# Altium PCB BAILEY.PcbDoc (part 3 of 8)
Units mil, origin at the board's own origin, x right, y up, seen from the top; angles counter-clockwise.
Board outline 4500 x 4000 mil, 4 copper layers (Signal Layer 1, Signal Layer 2, Signal Layer 3, Signal Layer 4), stack 59.904 mil thick; 190 components, 117 nets, 664 pads, 291 vias.
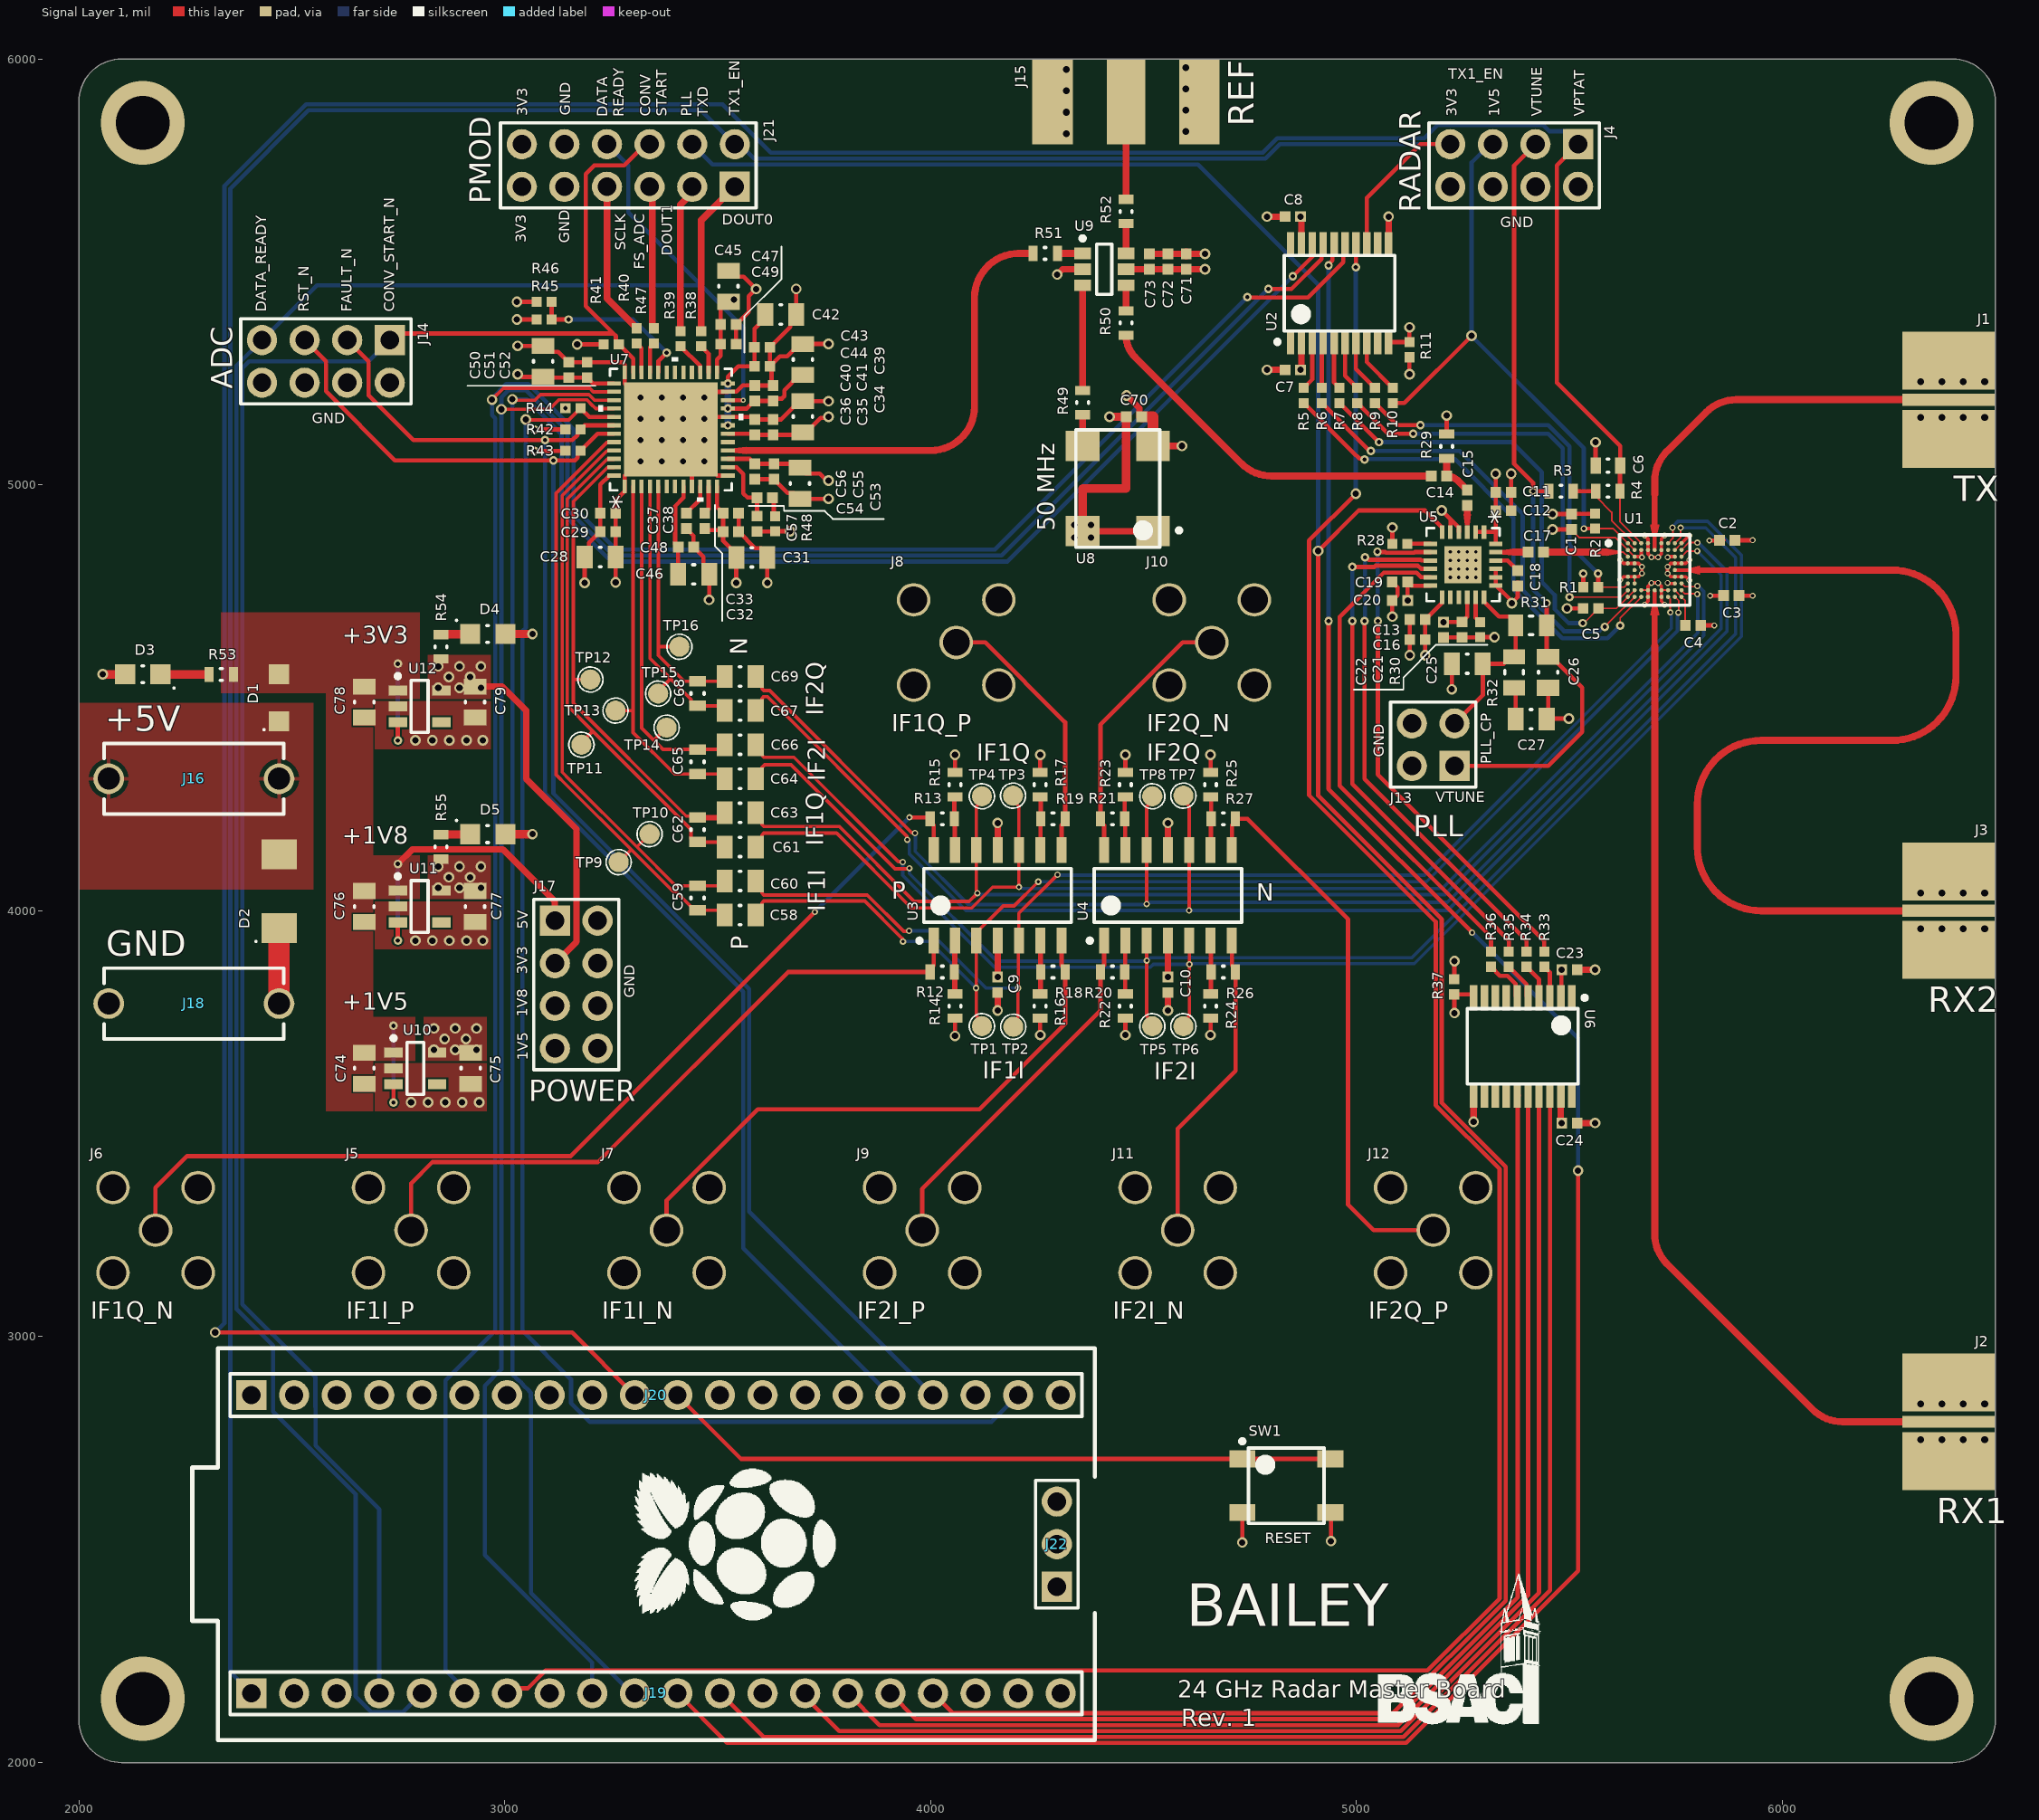
[diagram p0: Signal Layer 1 view]

## Part data (continued)
C74 C75 C76 C77 C78 C79: library part CAP, "50V 1uF X7R ±10% 0805 Multilayer Ceramic Capacitors MLCC - SMD/SMT ROHS", Case Code (Imperial)=0805, Case Code (Metric)=2012, Dielectric=Ceramic, Manufacturer="Samsung Electro-Mechanics", Manufacturer Part Number=CL21B105KBFNNNE, Max Operating Temperature=125°C, Min Operating Temperature=-55°C, Supplier Part Number=1276-1029-1-ND, Tolerance=10%, Voltage=50V, Voltage Rating="50 V", Case/Package=0805, Category="Ceramic Capacitors", China RoHS=Compliant, ComponentLink1Description=https://datasheet.octopart.com:443/CL21B105KBFNNNE-Samsung-Electro-Mechanics-datasheet-136482495.pdf?src-supplier=IHS, ComponentLink1URL=https://datasheet.octopart.com:443/CL21B105KBFNNNE-Samsung-Electro-Mechanics-datasheet-136482495.pdf?src-supplier=IHS, ComponentLink2Description=https://datasheet.octopart.com:443/CL21B105KBFNNNE-Samsung-Electro-Mechanics-datasheet-11733377.pdf?src-supplier=Future+Electronics, ComponentLink2URL=https://datasheet.octopart.com:443/CL21B105KBFNNNE-Samsung-Electro-Mechanics-datasheet-11733377.pdf?src-supplier=Future+Electronics, ComponentLink3Description=https://datasheet.octopart.com:443/CL21B105KBFNNNE-Samsung-Electro-Mechanics-datasheet-116891038.pdf?src-supplier=Future+Electronics, ComponentLink3URL=https://datasheet.octopart.com:443/CL21B105KBFNNNE-Samsung-Electro-Mechanics-datasheet-116891038.pdf?src-supplier=Future+Electronics, ComponentLink4Description=https://datasheet.octopart.com:443/CL21B105KBFNNNE-Samsung-Electro-Mechanics-datasheet-81462183.pdf?src-supplier=Future+Electronics, ComponentLink4URL=https://datasheet.octopart.com:443/CL21B105KBFNNNE-Samsung-Electro-Mechanics-datasheet-81462183.pdf?src-supplier=Future+Electronics, ComponentLink5Description=https://datasheet.octopart.com:443/CL21B105KBFNNNE-Samsung-datasheet-48647582.pdf?src-supplier=Future+Electronics, ComponentLink5URL=https://datasheet.octopart.com:443/CL21B105KBFNNNE-Samsung-datasheet-48647582.pdf?src-supplier=Future+Electronics, ComponentLink6Description=https://datasheet.octopart.com:443/CL21B105KBFNNNE-Samsung-datasheet-8326294.pdf?src-supplier=Future+Electronics, ComponentLink6URL=https://datasheet.octopart.com:443/CL21B105KBFNNNE-Samsung-datasheet-8326294.pdf?src-supplier=Future+Electronics, ComponentLink7Description=https://datasheet.octopart.com:443/CL21B105KBFNNNE-Samsung-Electro-Mechanics-datasheet-149045959.pdf?src-supplier=Future+Electronics, ComponentLink7URL=https://datasheet.octopart.com:443/CL21B105KBFNNNE-Samsung-Electro-Mechanics-datasheet-149045959.pdf?src-supplier=Future+Electronics, ComponentLink8Description=https://datasheet.octopart.com/CL21B105KBFNNNE-Samsung-Electro-Mechanics-datasheet-97040617.pdf, ComponentLink8URL=https://datasheet.octopart.com/CL21B105KBFNNNE-Samsung-Electro-Mechanics-datasheet-97040617.pdf, ComponentLink9Description=https://datasheet.octopart.com/CL21B105KBFNNNE-Samsung-Electro-Mechanics-datasheet-8324245.pdf, ComponentLink9URL=https://datasheet.octopart.com/CL21B105KBFNNNE-Samsung-Electro-Mechanics-datasheet-8324245.pdf, ComponentLink10Description=https://datasheet.octopart.com:443/CL21B105KBFNNNE-Samsung-datasheet-59220082.pdf?src-supplier=TME, ComponentLink10URL=https://datasheet.octopart.com:443/CL21B105KBFNNNE-Samsung-datasheet-59220082.pdf?src-supplier=TME, Country of Origin="Mainland China, Philippines, South Korea", Depth=1.25mm, Dielectric Material=Ceramic, Export Control Classification Number (ECCN) Code=EAR99, Harmonized Tariff Schedule (HTS) Code=8532.24.00.20, Height=1.35mm, Introduction Date=2010-07-30, Length=2mm, Lifecycle Status=Production, Material=Ceramic, Mounting Technology="Surface Mount", Number of Terminals=2, Package Size=0805, Pricing="1=0.08, 10=0.013 (USD)", Radiation Hardening=No, REACH SVHC=Yes, RoHS=Compliant, Schedule B="8532240020, 8532240020|8532240020, 8532240020|8532240020|8532240020, 8532240020|8532240020|8532240020|8532240020", Stock=1783591, Supplier=DigiKey, Thickness=1.3462mm, Voltage Rating (DC)=50V, Width=1.25mm
D1: "Rectifier Diode, Schottky, 1 Phase, 1 Element, 1.5A, 30V V(RRM)", Average Rectified Current=1.5A, Current="1.5 A", Forward Voltage="360 mV @ 1.5 A", Manufacturer="Toshiba Semiconductor and Storage", Manufacturer Part Number=CRS08(TE85L,Q,M), Max Forward Surge Current (Ifsm)=30A, Max Junction Temperature (Tj)=125°C, Max Repetitive Reverse Voltage (Vrrm)=30V, Max Reverse Leakage Current=1mA, Min Operating Temperature=-40°C, Peak Reverse Current=50µA, Reverse Leakage Current="1 mA @ 30 V", Reverse Voltage="30 V", Supplier Part Number=CRS08QMCT-ND, Category="Rectifier Diodes", ComponentLink1Description=https://datasheet.octopart.com:443/CRS08%28TE85L%2CQ%2CM%29-Toshiba-datasheet-181389526.pdf?src-supplier=IHS, ComponentLink1URL=https://datasheet.octopart.com:443/CRS08%28TE85L%2CQ%2CM%29-Toshiba-datasheet-181389526.pdf?src-supplier=IHS, ComponentLink2Description=https://datasheet.octopart.com:443/CRS08%28TE85L%2CQ%2CM%29-Toshiba-datasheet-11891833.pdf?src-supplier=_legacy+Avnet, ComponentLink2URL=https://datasheet.octopart.com:443/CRS08%28TE85L%2CQ%2CM%29-Toshiba-datasheet-11891833.pdf?src-supplier=_legacy+Avnet, ComponentLink3Description=https://datasheet.octopart.com:443/CRS08%28TE85L%2CQ%2CM%29-Toshiba-datasheet-97785529.pdf?src-supplier=TME, ComponentLink3URL=https://datasheet.octopart.com:443/CRS08%28TE85L%2CQ%2CM%29-Toshiba-datasheet-97785529.pdf?src-supplier=TME, ComponentLink4Description=https://datasheet.octopart.com:443/CRS08%28TE85L%2CQ%2CM%29-Toshiba-datasheet-15948935.pdf?src-supplier=iiiC, ComponentLink4URL=https://datasheet.octopart.com:443/CRS08%28TE85L%2CQ%2CM%29-Toshiba-datasheet-15948935.pdf?src-supplier=iiiC, Contact Plating="Silver, Tin", Element Configuration=Single, Export Control Classification Number (ECCN) Code=EAR99, Forward Current=1.5A, Harmonized Tariff Schedule (HTS) Code=8541.10.00.80, Height=1.08mm, Introduction Date=2000-03-07, Lead Free="Lead Free", Lifecycle Status=Production, Max Operating Temperature=125°C, Max Output current=1.5A, Max Reverse Voltage (DC)=30V, Max Surge Current=30A, Mounting Technology="Surface Mount", Number of Elements=1, Packaging="Cut Tape (CT)", Peak Non-Repetitive Surge Current=30A, Pins=2, Pricing="1=0.61, 10=0.374, 100=0.2556, 500=0.19356, 1000=0.17356 (USD)", Radiation Hardening=No, REACH SVHC=No, Reverse Standoff Voltage=30V, RoHS=Compliant, Schedule B="8541100080, 8541100080|8541100080|8541100080|8541100080|8541100080", Stock=58545, Supplier=DigiKey
D2: "SMAJ Series 10.3 V 0.4 kW Surface Mount Uni-Directional TVS Diode - DO-214AC", Breakdown Voltage="6.67 V", Clamping Voltage=10.3V, Current=41A, Forward Voltage=3.5V, Leakage Current=1µA, Manufacturer="Littelfuse Inc.", Max Breakdown Voltage=7.37V, Max Junction Temperature (Tj)=150°C, Max Power Dissipation=3.3W, Max Reverse Leakage Current=800µA, Max Surge Current=38.8A, Maximum Clamping Voltage="10.3 V", Min Breakdown Voltage=6.67V, Min Operating Temperature=-65°C, Operating Supply Voltage=6V, Peak Pulse Power=400W, Power Line Protection=No, Reverse Breakdown Voltage=66.7V, Reverse Standoff Voltage="6 V", Supplier Part Number=SMAJ6.0ALFCT-ND, Test Current=10mA, Voltage=60V, Category="TVS Diodes", China RoHS=Non-Compliant, ComponentLink1Description=https://datasheet.octopart.com:443/SMAJ6.0A-Littelfuse-datasheet-150463581.pdf?src-supplier=Newark, ComponentLink1URL=https://datasheet.octopart.com:443/SMAJ6.0A-Littelfuse-datasheet-150463581.pdf?src-supplier=Newark, ComponentLink2Description=https://datasheet.octopart.com:443/SMAJ6.0A-Littelfuse-datasheet-63710798.pdf?src-supplier=element14+APAC, ComponentLink2URL=https://datasheet.octopart.com:443/SMAJ6.0A-Littelfuse-datasheet-63710798.pdf?src-supplier=element14+APAC, ComponentLink3Description=https://datasheet.octopart.com:443/SMAJ6.0A-Littelfuse-datasheet-11547152.pdf?src-supplier=Farnell, ComponentLink3URL=https://datasheet.octopart.com:443/SMAJ6.0A-Littelfuse-datasheet-11547152.pdf?src-supplier=Farnell, ComponentLink4Description=https://datasheet.octopart.com:443/SMAJ6.0A-Littelfuse-datasheet-5393952.pdf?src-supplier=Farnell, ComponentLink4URL=https://datasheet.octopart.com:443/SMAJ6.0A-Littelfuse-datasheet-5393952.pdf?src-supplier=Farnell, ComponentLink5Description=https://datasheet.octopart.com:443/SMAJ6.0A-Littelfuse-datasheet-511791.pdf?src-supplier=Farnell, ComponentLink5URL=https://datasheet.octopart.com:443/SMAJ6.0A-Littelfuse-datasheet-511791.pdf?src-supplier=Farnell, ComponentLink6Description=https://datasheet.octopart.com:443/SMAJ6.0A-Littelfuse-datasheet-165289143.pdf?src-supplier=Electro+Sonic, ComponentLink6URL=https://datasheet.octopart.com:443/SMAJ6.0A-Littelfuse-datasheet-165289143.pdf?src-supplier=Electro+Sonic, ComponentLink7Description=https://datasheet.octopart.com:443/SMAJ6.0A-Littelfuse-datasheet-112042111.pdf?src-supplier=JRH+Electronics, ComponentLink7URL=https://datasheet.octopart.com:443/SMAJ6.0A-Littelfuse-datasheet-112042111.pdf?src-supplier=JRH+Electronics, ComponentLink8Description=https://datasheet.octopart.com:443/SMAJ6.0A-Littelfuse-datasheet-17901671.pdf?src-supplier=Future+Electronics, ComponentLink8URL=https://datasheet.octopart.com:443/SMAJ6.0A-Littelfuse-datasheet-17901671.pdf?src-supplier=Future+Electronics, ComponentLink9Description=https://datasheet.octopart.com:443/SMAJ6.0A-Littelfuse-datasheet-1053.pdf?src-supplier=DigiKey, ComponentLink9URL=https://datasheet.octopart.com:443/SMAJ6.0A-Littelfuse-datasheet-1053.pdf?src-supplier=DigiKey, Composition=Zener, Country of Origin="Mainland China, Malaysia", Direction=Unidirectional, Export Control Classification Number (ECCN) Code=EAR99, Harmonized Tariff Schedule (HTS) Code=8541.10.00.50, Height=2.29mm, Introduction Date=2003-11-20, Lead Free="Lead Free", Length=5.28mm, Lifecycle Status=Production, Manufacturer Part Number=SMAJ6.0A, Max Operating Temperature=150°C, Mounting Technology="Surface Mount", Number of Channels=1, Number of Elements=1, Number of Terminals=2, Number of Unidirectional Channels=1, Packaging="Cut Tape", Peak Pulse Current=38.8A, Peak Reverse Current=800µA, Pins=2, Polarity=Unidirectional, Power Dissipation=400W, Power Rating=400W, Pricing="1=0.16, 10=0.129, 100=0.098, 500=0.097, 1000=0.096, 2000=0.0955, 5000=0.075, 10000=0.06958, 15000=0.05923, 25000=0.05912 (USD)", Radiation Hardening=No, REACH SVHC=No, Reverse Voltage=6V, RoHS=Compliant, Schedule B="8541100080, 8541100080|8541100080|8541100080|8541100080|8541100080", Stock=52074, Supplier=DigiKey, Termination=SMD/SMT, Voltage Rating (DC)=6V, Width=2.79mm
D3 D4 D5: "Chip Type LED, 0805, Flat Lens, Red", Current="20 mA", Forward Voltage="1.5 V", Manufacturer=Venkel, Manufacturer Part Number=CTL0805FRD1T-CT, Package Size=0805
J1 J2 J3: "RF / Coaxial Connector, Slide On, SMA Coaxial, Straight Jack, Board Edge / End Launch, 50 ohm", Case/Package=SMA, Clock Frequency=26.5GHz, Manufacturer=Amphenol, Max Operating Temperature=165°C, Maximum Frequency="26.5 GHz", Min Operating Temperature=-65°C, Supplier Part Number=ARF2505-ND, Voltage Rating=170V, Category="RF / Coaxial Connectors", ComponentLink1Description=https://datasheet.octopart.com:443/901-10513-2-Amphenol-RF-datasheet-178931826.pdf?src-supplier=Master+Electronics, ComponentLink1URL=https://datasheet.octopart.com:443/901-10513-2-Amphenol-RF-datasheet-178931826.pdf?src-supplier=Master+Electronics, ComponentLink2Description=https://datasheet.octopart.com:443/901-10513-2-Amphenol-RF-datasheet-151206439.pdf?src-supplier=Farnell, ComponentLink2URL=https://datasheet.octopart.com:443/901-10513-2-Amphenol-RF-datasheet-151206439.pdf?src-supplier=Farnell, ComponentLink3Description=https://datasheet.octopart.com:443/901-10513-2-Amphenol-RF-datasheet-67291285.pdf?src-supplier=element14+APAC, ComponentLink3URL=https://datasheet.octopart.com:443/901-10513-2-Amphenol-RF-datasheet-67291285.pdf?src-supplier=element14+APAC, ComponentLink4Description=https://datasheet.octopart.com:443/901-10513-2-Amphenol-RF-datasheet-114836026.pdf?src-supplier=RS+(Formerly+Allied+Electronics), ComponentLink4URL=https://datasheet.octopart.com:443/901-10513-2-Amphenol-RF-datasheet-114836026.pdf?src-supplier=RS+(Formerly+Allied+Electronics), ComponentLink5Description=https://datasheet.octopart.com:443/901-10513-2-Amphenol-datasheet-133515873.pdf?src-supplier=X-ON, ComponentLink5URL=https://datasheet.octopart.com:443/901-10513-2-Amphenol-datasheet-133515873.pdf?src-supplier=X-ON, ComponentLink6Description=https://datasheet.octopart.com:443/901-10513-2-Amphenol-RF-datasheet-177020679.pdf?src-supplier=Burklin+Elektronik, ComponentLink6URL=https://datasheet.octopart.com:443/901-10513-2-Amphenol-RF-datasheet-177020679.pdf?src-supplier=Burklin+Elektronik, Connector Type="SMA, Socket", Contact Material=Copper, Fastening Type=Threaded, Frequency=26.5GHz, Impedance=50Ω, Lifecycle Status=Production, Manufacturer Part Number=901-10513-2, Mounting Technology=Edge, Orientation=Straight, Pricing="1=12.16, 10=9.797, 25=9.5496, 50=8.9602, 100=8.8921, 300=8.09207, 500=7.625 (USD)", RoHS=Compliant, Stock=99, Supplier=DigiKey, Termination=Solder
J4 J14 J17: library part CONN_2x4_2.54mm_PinHeader_Vertical, "Pin Header, Board-to-Board, 2.54 mm, 2 Rows, 8 Contacts, Through Hole, TSW Series", Color=Black, Manufacturer=Samtec, Manufacturer Lifecycle Status=PRODUCTION, Manufacturer Part Number=TSW-104-07-F-D, Max Current Rating=7.6A, Max Operating Temperature=125°C, Max Voltage Rating (AC)=550V, Min Operating Temperature=-55°C, Supplier Part Number=SAM8996-ND, Category="Headers and Wire Housings", ComponentLink1Description=https://datasheet.octopart.com:443/TSW-104-07-F-D-Samtec-datasheet-97325576.pdf?src-supplier=Sager+Electronics, ComponentLink1URL=https://datasheet.octopart.com:443/TSW-104-07-F-D-Samtec-datasheet-97325576.pdf?src-supplier=Sager+Electronics, ComponentLink2Description=https://datasheet.octopart.com:443/TSW-104-07-F-D-Samtec-datasheet-151455181.pdf?src-supplier=Sager+Electronics, ComponentLink2URL=https://datasheet.octopart.com:443/TSW-104-07-F-D-Samtec-datasheet-151455181.pdf?src-supplier=Sager+Electronics, ComponentLink3Description=https://sigma.octopart.com:443/97325577/technical_drawing/Samtec-TSW-104-07-F-D.pdf?src-supplier=HQonline, ComponentLink3URL=https://sigma.octopart.com:443/97325577/technical_drawing/Samtec-TSW-104-07-F-D.pdf?src-supplier=HQonline, ComponentLink4Description=https://datasheet.octopart.com:443/TSW-104-07-F-D-Samtec-datasheet-136646178.pdf?src-supplier=Master+Electronics, ComponentLink4URL=https://datasheet.octopart.com:443/TSW-104-07-F-D-Samtec-datasheet-136646178.pdf?src-supplier=Master+Electronics, ComponentLink5Description=https://datasheet.octopart.com:443/TSW-104-07-F-D-Samtec-datasheet-182948906.pdf?src-supplier=JRH+Electronics, ComponentLink5URL=https://datasheet.octopart.com:443/TSW-104-07-F-D-Samtec-datasheet-182948906.pdf?src-supplier=JRH+Electronics, ComponentLink6Description=https://datasheet.octopart.com:443/TSW-104-07-F-D-Samtec-datasheet-160657603.pdf?src-supplier=Toby+Electronics, ComponentLink6URL=https://datasheet.octopart.com:443/TSW-104-07-F-D-Samtec-datasheet-160657603.pdf?src-supplier=Toby+Electronics, ComponentLink7Description=https://datasheet.octopart.com:443/TSW-104-07-F-D-Samtec-datasheet-116539033.pdf?src-supplier=Toby+Electronics, ComponentLink7URL=https://datasheet.octopart.com:443/TSW-104-07-F-D-Samtec-datasheet-116539033.pdf?src-supplier=Toby+Electronics, ComponentLink8Description=https://datasheet.octopart.com:443/TSW-104-07-F-D-Samtec-datasheet-116536310.pdf?src-supplier=Toby+Electronics, ComponentLink8URL=https://datasheet.octopart.com:443/TSW-104-07-F-D-Samtec-datasheet-116536310.pdf?src-supplier=Toby+Electronics, ComponentLink9Description=https://datasheet.octopart.com:443/TSW-104-07-F-D-Samtec-datasheet-116615235.pdf?src-supplier=Electro+Sonic, ComponentLink9URL=https://datasheet.octopart.com:443/TSW-104-07-F-D-Samtec-datasheet-116615235.pdf?src-supplier=Electro+Sonic, ComponentLink10Description=https://datasheet.octopart.com/TSW-104-07-F-D-Samtec-datasheet-86818365.pdf, ComponentLink10URL=https://datasheet.octopart.com/TSW-104-07-F-D-Samtec-datasheet-86818365.pdf, ComponentLink11Description=https://datasheet.octopart.com:443/TSW-104-07-F-D-Samtec-datasheet-62107121.pdf?src-supplier=Newark, ComponentLink11URL=https://datasheet.octopart.com:443/TSW-104-07-F-D-Samtec-datasheet-62107121.pdf?src-supplier=Newark, ComponentLink12Description=https://datasheet.octopart.com:443/TSW-104-07-F-D-Samtec-datasheet-11047283.pdf?src-supplier=Newark, ComponentLink12URL=https://datasheet.octopart.com:443/TSW-104-07-F-D-Samtec-datasheet-11047283.pdf?src-supplier=Newark, Connector Type="Male Pin", Contact Material=Bronze, Contact Mating Length=5.842mm, Contact Plating=Gold, Depth=5.08mm, Gender=Male, Housing Color=Black, Housing Material=Polyester, Lead Pitch=2.54mm, Length=10.16mm, Lifecycle Status=Production, Mounting Technology="Through Hole", Number of Contacts=8, Number of Positions=8, Number of Rows=2, Orientation=Straight, Pitch=2.54mm, Pricing="1=0.43, 50=0.37, 100=0.31, 500=0.26, 1000=0.22, 2000=0.19, 5000=0.17, 10000=0.15 (USD)", Radiation Hardening=No, REACH SVHC=No, RoHS=Compliant, Row Spacing=2.54mm, Stock=18480, Supplier=DigiKey, Termination=Solder
J5 J6 J7 J8 J9 J10 J11 J12: "RF / Coaxial Connector, SMA Coaxial, Straight Jack, Through Hole Vertical, 50 ohm", Case/Package=SMA, Clock Frequency=6GHz, Dielectric Material=PTFE, Frequency=20GHz, Housing Color=Gold, Manufacturer=Samtec, Manufacturer Lifecycle Status=PRODUCTION, Manufacturer Part Number=SMA-J-P-H-ST-TH1, Max Operating Temperature=125°C, Maximum Frequency="20 GHz", Min Operating Temperature=-65°C, Supplier Part Number=SAM8971-ND, Voltage Rating=335V, Body Material=Brass, Body Plating=Gold, Category="RF / Coaxial Connectors", ComponentLink1Description=https://datasheet.octopart.com:443/SMA-J-P-H-ST-TH1-Samtec-datasheet-104427088.pdf?src-supplier=Upverter, ComponentLink1URL=https://datasheet.octopart.com:443/SMA-J-P-H-ST-TH1-Samtec-datasheet-104427088.pdf?src-supplier=Upverter, ComponentLink2Description=https://sigma.octopart.com:443/97281565/technical_drawing/Samtec-SMA-J-P-H-ST-TH1.pdf?src-supplier=Upverter, ComponentLink2URL=https://sigma.octopart.com:443/97281565/technical_drawing/Samtec-SMA-J-P-H-ST-TH1.pdf?src-supplier=Upverter, ComponentLink3Description=https://datasheet.octopart.com:443/SMA-J-P-H-ST-TH1-Samtec-datasheet-97281556.pdf?src-supplier=Electro+Sonic, ComponentLink3URL=https://datasheet.octopart.com:443/SMA-J-P-H-ST-TH1-Samtec-datasheet-97281556.pdf?src-supplier=Electro+Sonic, ComponentLink4Description=https://datasheet.octopart.com:443/SMA-J-P-H-ST-TH1-Samtec-datasheet-157420883.pdf?src-supplier=Newark, ComponentLink4URL=https://datasheet.octopart.com:443/SMA-J-P-H-ST-TH1-Samtec-datasheet-157420883.pdf?src-supplier=Newark, ComponentLink5Description=https://datasheet.octopart.com:443/SMA-J-P-H-ST-TH1-Samtec-datasheet-180264035.pdf?src-supplier=JRH+Electronics, ComponentLink5URL=https://datasheet.octopart.com:443/SMA-J-P-H-ST-TH1-Samtec-datasheet-180264035.pdf?src-supplier=JRH+Electronics, ComponentLink6Description=https://datasheet.octopart.com:443/SMA-J-P-H-ST-TH1-Samtec-datasheet-159753816.pdf?src-supplier=Toby+Electronics, ComponentLink6URL=https://datasheet.octopart.com:443/SMA-J-P-H-ST-TH1-Samtec-datasheet-159753816.pdf?src-supplier=Toby+Electronics, ComponentLink7Description=https://datasheet.octopart.com:443/SMA-J-P-H-ST-TH1-Samtec-datasheet-116536392.pdf?src-supplier=Toby+Electronics, ComponentLink7URL=https://datasheet.octopart.com:443/SMA-J-P-H-ST-TH1-Samtec-datasheet-116536392.pdf?src-supplier=Toby+Electronics, ComponentLink8Description=https://datasheet.octopart.com:443/SMA-J-P-H-ST-TH1-Samtec-datasheet-116536236.pdf?src-supplier=Toby+Electronics, ComponentLink8URL=https://datasheet.octopart.com:443/SMA-J-P-H-ST-TH1-Samtec-datasheet-116536236.pdf?src-supplier=Toby+Electronics, Connector Type="SMA, Socket", Contact Material=Gold, Contact Plating=Gold, Depth=7mm, Fastening Type=Threaded, Gender=Female, Height=9.81mm, Impedance=50Ω, Insulation Material=Polytetrafluoroethylene, Length=7mm, Lifecycle Status=Production, Mounting Technology="Flanges, Panel, Through Hole", Number of Contacts=1, Orientation=Straight, Pricing="1=2.75, 10=2.333, 25=2.1864, 50=2.0818, 100=1.9823, 250=1.85816, 500=1.76948, 1000=1.68505, 2500=1.584 (USD)", Radiation Hardening=No, RoHS=Compliant, Stock=25259, Supplier=DigiKey, Termination=Solder
J13: library part CONN_2x2_2.54mm_PinHeader_Vertical, "Pin Header, Board-to-Board, 2.54 mm, 2 Rows, 4 Contacts, Through Hole, TSW Series", Color=Black, Manufacturer=Samtec, Manufacturer Lifecycle Status=PRODUCTION, Manufacturer Part Number=TSW-102-07-F-D, Max Current Rating=7.6A, Max Operating Temperature=125°C, Max Voltage Rating (AC)=550V, Min Operating Temperature=-55°C, Supplier Part Number=SAM10843-ND, Category="Headers and Wire Housings", ComponentLink1Description=https://datasheet.octopart.com:443/TSW-102-07-F-D-Samtec-datasheet-97325576.pdf?src-supplier=Sager+Electronics, ComponentLink1URL=https://datasheet.octopart.com:443/TSW-102-07-F-D-Samtec-datasheet-97325576.pdf?src-supplier=Sager+Electronics, ComponentLink2Description=https://datasheet.octopart.com:443/TSW-102-07-F-D-Samtec-datasheet-151455181.pdf?src-supplier=Sager+Electronics, ComponentLink2URL=https://datasheet.octopart.com:443/TSW-102-07-F-D-Samtec-datasheet-151455181.pdf?src-supplier=Sager+Electronics, ComponentLink3Description=https://sigma.octopart.com:443/97325577/technical_drawing/Samtec-TSW-102-07-F-D.pdf?src-supplier=HQonline, ComponentLink3URL=https://sigma.octopart.com:443/97325577/technical_drawing/Samtec-TSW-102-07-F-D.pdf?src-supplier=HQonline, ComponentLink4Description=https://datasheet.octopart.com:443/TSW-102-07-F-D-Samtec-datasheet-62107121.pdf?src-supplier=Farnell, ComponentLink4URL=https://datasheet.octopart.com:443/TSW-102-07-F-D-Samtec-datasheet-62107121.pdf?src-supplier=Farnell, ComponentLink5Description=https://datasheet.octopart.com:443/TSW-102-07-F-D-Samtec-datasheet-136646178.pdf?src-supplier=Master+Electronics, ComponentLink5URL=https://datasheet.octopart.com:443/TSW-102-07-F-D-Samtec-datasheet-136646178.pdf?src-supplier=Master+Electronics, ComponentLink6Description=https://datasheet.octopart.com:443/TSW-102-07-F-D-Samtec-datasheet-118235302.pdf?src-supplier=Electro+Sonic, ComponentLink6URL=https://datasheet.octopart.com:443/TSW-102-07-F-D-Samtec-datasheet-118235302.pdf?src-supplier=Electro+Sonic, ComponentLink7Description=https://datasheet.octopart.com:443/TSW-102-07-F-D-Samtec-datasheet-180258786.pdf?src-supplier=JRH+Electronics, ComponentLink7URL=https://datasheet.octopart.com:443/TSW-102-07-F-D-Samtec-datasheet-180258786.pdf?src-supplier=JRH+Electronics, ComponentLink8Description=https://datasheet.octopart.com:443/TSW-102-07-F-D-Samtec-datasheet-160657603.pdf?src-supplier=Toby+Electronics, ComponentLink8URL=https://datasheet.octopart.com:443/TSW-102-07-F-D-Samtec-datasheet-160657603.pdf?src-supplier=Toby+Electronics, ComponentLink9Description=https://datasheet.octopart.com:443/TSW-102-07-F-D-Samtec-datasheet-116539033.pdf?src-supplier=Toby+Electronics, ComponentLink9URL=https://datasheet.octopart.com:443/TSW-102-07-F-D-Samtec-datasheet-116539033.pdf?src-supplier=Toby+Electronics, ComponentLink10Description=https://datasheet.octopart.com:443/TSW-102-07-F-D-Samtec-datasheet-116536310.pdf?src-supplier=Toby+Electronics, ComponentLink10URL=https://datasheet.octopart.com:443/TSW-102-07-F-D-Samtec-datasheet-116536310.pdf?src-supplier=Toby+Electronics, ComponentLink11Description=https://datasheet.octopart.com/TSW-102-07-F-D-Samtec-datasheet-86818365.pdf, ComponentLink11URL=https://datasheet.octopart.com/TSW-102-07-F-D-Samtec-datasheet-86818365.pdf, ComponentLink12Description=https://datasheet.octopart.com:443/TSW-102-07-F-D-Samtec-datasheet-11047283.pdf?src-supplier=Newark, ComponentLink12URL=https://datasheet.octopart.com:443/TSW-102-07-F-D-Samtec-datasheet-11047283.pdf?src-supplier=Newark, Connector Type="Male Pin", Contact Material=Bronze, Contact Mating Length=5.842mm, Contact Plating=Gold, Depth=5.08mm, Gender=Male, Housing Color=Black, Housing Material=Polyester, Lead Pitch=2.54mm, Length=5.08mm, Lifecycle Status=Production, Mounting Technology="Through Hole", Number of Contacts=4, Number of Positions=4, Number of Rows=2, Orientation=Straight, Pitch=2.54mm, Pricing="1=0.22, 50=0.19, 100=0.16, 500=0.14, 1000=0.11, 2000=0.1, 5000=0.09, 10000=0.08206 (USD)", Radiation Hardening=No, REACH SVHC=No, RoHS=Compliant, Row Spacing=2.54mm, Stock=11283, Supplier=DigiKey, Termination=Solder
J15: "RF / Coaxial Connector, SMA Coaxial, Straight Jack, Solder, 50 ohm, Beryllium Copper", Case/Package=SMA, Clock Frequency=18GHz, Contact Resistance=4mΩ, Dielectric Material=PTFE, Housing Color=Gold, Insulation Resistance=5GΩ, Manufacturer="Cinch Connectivity Solutions Johnson", Manufacturer Part Number=142-0701-801, Max Operating Temperature=165°C, Maximum Frequency="18 GHz", Min Operating Temperature=-65°C, Supplier Part Number=J502-ND, Voltage Rating=335V, Body Material=Brass, Body Plating=Gold, Category="RF / Coaxial Connectors", ComponentLink1Description=https://datasheet.octopart.com:443/142-0701-801-Cinch-Connectors-datasheet-38159423.pdf?src-supplier=element14+APAC, ComponentLink1URL=https://datasheet.octopart.com:443/142-0701-801-Cinch-Connectors-datasheet-38159423.pdf?src-supplier=element14+APAC, ComponentLink2Description=https://datasheet.octopart.com:443/142-0701-801-Cinch-Connectivity-Solutions-datasheet-128878268.pdf?src-supplier=JRH+Electronics, ComponentLink2URL=https://datasheet.octopart.com:443/142-0701-801-Cinch-Connectivity-Solutions-datasheet-128878268.pdf?src-supplier=JRH+Electronics, ComponentLink3Description=https://datasheet.octopart.com:443/142-0701-801-Cinch-Connectivity-Solutions-datasheet-180501451.pdf?src-supplier=IHS, ComponentLink3URL=https://datasheet.octopart.com:443/142-0701-801-Cinch-Connectivity-Solutions-datasheet-180501451.pdf?src-supplier=IHS, ComponentLink4Description=https://datasheet.octopart.com:443/142-0701-801-Cinch-Connectivity-Solutions-datasheet-182240672.pdf?src-supplier=IHS, ComponentLink4URL=https://datasheet.octopart.com:443/142-0701-801-Cinch-Connectivity-Solutions-datasheet-182240672.pdf?src-supplier=IHS, ComponentLink5Description=https://datasheet.octopart.com:443/142-0701-801-Emerson-datasheet-182246267.pdf?src-supplier=IHS, ComponentLink5URL=https://datasheet.octopart.com:443/142-0701-801-Emerson-datasheet-182246267.pdf?src-supplier=IHS, ComponentLink6Description=https://datasheet.octopart.com:443/142-0701-801-Emerson-Network-Power-datasheet-40124.pdf?src-supplier=Newark, ComponentLink6URL=https://datasheet.octopart.com:443/142-0701-801-Emerson-Network-Power-datasheet-40124.pdf?src-supplier=Newark, ComponentLink7Description=https://datasheet.octopart.com:443/142-0701-801-Cinch-Connectors-datasheet-24914353.pdf?src-supplier=Electro+Sonic, ComponentLink7URL=https://datasheet.octopart.com:443/142-0701-801-Cinch-Connectors-datasheet-24914353.pdf?src-supplier=Electro+Sonic, ComponentLink8Description=https://datasheet.octopart.com:443/142-0701-801-Emerson-Network-Power-datasheet-14433785.pdf?src-supplier=Farnell, ComponentLink8URL=https://datasheet.octopart.com:443/142-0701-801-Emerson-Network-Power-datasheet-14433785.pdf?src-supplier=Farnell, ComponentLink9Description=https://datasheet.octopart.com:443/142-0701-801-Emerson-Network-Power-datasheet-8828422.pdf?src-supplier=Farnell, ComponentLink9URL=https://datasheet.octopart.com:443/142-0701-801-Emerson-Network-Power-datasheet-8828422.pdf?src-supplier=Farnell, ComponentLink10Description=https://datasheet.octopart.com:443/142-0701-801-Emerson-Network-Power-datasheet-10031126.pdf?src-supplier=Farnell, ComponentLink10URL=https://datasheet.octopart.com:443/142-0701-801-Emerson-Network-Power-datasheet-10031126.pdf?src-supplier=Farnell, ComponentLink11Description=https://datasheet.octopart.com:443/142-0701-801-Emerson-Network-Power-datasheet-47159.pdf?src-supplier=Farnell, ComponentLink11URL=https://datasheet.octopart.com:443/142-0701-801-Emerson-Network-Power-datasheet-47159.pdf?src-supplier=Farnell, ComponentLink12Description=https://datasheet.octopart.com:443/142-0701-801-Emerson-Network-Power-datasheet-29036.pdf?src-supplier=Farnell, ComponentLink12URL=https://datasheet.octopart.com:443/142-0701-801-Emerson-Network-Power-datasheet-29036.pdf?src-supplier=Farnell, ComponentLink13Description=https://datasheet.octopart.com:443/142-0701-801-Semflex-datasheet-33021794.pdf?src-supplier=East+Coast+Microwave, ComponentLink13URL=https://datasheet.octopart.com:443/142-0701-801-Semflex-datasheet-33021794.pdf?src-supplier=East+Coast+Microwave, ComponentLink14Description=https://datasheet.octopart.com:443/142-0701-801-Emerson-datasheet-31818286.pdf?src-supplier=East+Coast+Microwave, ComponentLink14URL=https://datasheet.octopart.com:443/142-0701-801-Emerson-datasheet-31818286.pdf?src-supplier=East+Coast+Microwave, ComponentLink15Description=https://datasheet.octopart.com:443/142-0701-801-Cinch-Connectors-datasheet-27682.pdf?src-supplier=RS+(Formerly+Allied+Electronics), ComponentLink15URL=https://datasheet.octopart.com:443/142-0701-801-Cinch-Connectors-datasheet-27682.pdf?src-supplier=RS+(Formerly+Allied+Electronics), ComponentLink16Description=https://datasheet.octopart.com:443/142-0701-801-Emerson-Network-Power-datasheet-644257.pdf?src-supplier=Future+Electronics, ComponentLink16URL=https://datasheet.octopart.com:443/142-0701-801-Emerson-Network-Power-datasheet-644257.pdf?src-supplier=Future+Electronics, ComponentLink17Description=https://datasheet.octopart.com:443/142-0701-801-Emerson-Network-Power-datasheet-55164.pdf?src-supplier=_legacy+Avnet, ComponentLink17URL=https://datasheet.octopart.com:443/142-0701-801-Emerson-Network-Power-datasheet-55164.pdf?src-supplier=_legacy+Avnet, Connector Type="Coaxial, PCB, SMA, Socket", Contact Gender=Female, Contact Material="Gold, Nickel", Contact Plating=Gold, Depth=25.58mm, Export Control Classification Number (ECCN) Code=EAR99, Fastening Type=Threaded, Frequency=18GHz, Gender=Female, Harmonized Tariff Schedule (HTS) Code=8536.69.40.10, Height=9.779mm, Housing Material=Brass, Impedance=50Ω, Insulation Material=PTFE, Introduction Date=1994-06-01, Lead Free="Lead Free", Length=9.52mm, Lifecycle Status=Production, Mounting Technology="Edge, PCB", Number of Contacts=1, Number of Ports=1, Orientation=Straight, Pins=1, Polarity=Normal, Pricing="1=3.73, 10=3.166, 25=2.9676, 50=2.826, 100=2.691, 250=2.52244, 500=2.40206, 1000=2.28748, 2500=2.1444 (USD)", Radiation Hardening=No, REACH SVHC=No, RoHS=Compliant, Schedule B="8536695050, 8536695050|8536695050|8536695050|8536695050|8536695050", Shell Material=Brass, Stock=60433, Supplier=DigiKey, Termination=Solder
J16: "Red Tip Jack Standard Horizontal Pcb Mount For Diameter .080 Plug", Breakdown Voltage=2.1kV, Color=Red, Current Rating=5A, Manufacturer="Cinch Connectivity Solutions Johnson", Max Operating Temperature=75°C, Min Operating Temperature=-55°C, Supplier Part Number=J109-ND, Voltage Rating=1.5kV, Body Material="Nylon, Polyamide", Category=Connectors, ComponentLink1Description=https://datasheet.octopart.com:443/105-0752-001-Cinch-Connectors-datasheet-38159067.pdf?src-supplier=element14+APAC, ComponentLink1URL=https://datasheet.octopart.com:443/105-0752-001-Cinch-Connectors-datasheet-38159067.pdf?src-supplier=element14+APAC, ComponentLink2Description=https://datasheet.octopart.com:443/105-0752-001-Cinch-Connectors-datasheet-13703203.pdf?src-supplier=element14+APAC, ComponentLink2URL=https://datasheet.octopart.com:443/105-0752-001-Cinch-Connectors-datasheet-13703203.pdf?src-supplier=element14+APAC, ComponentLink3Description=https://datasheet.octopart.com:443/105-0752-001-Cinch-Connectivity-Solutions-datasheet-128870955.pdf?src-supplier=RS+(Formerly+Allied+Electronics), ComponentLink3URL=https://datasheet.octopart.com:443/105-0752-001-Cinch-Connectivity-Solutions-datasheet-128870955.pdf?src-supplier=RS+(Formerly+Allied+Electronics), ComponentLink4Description=https://datasheet.octopart.com:443/105-0752-001-Cinch-Connectors-datasheet-9995220.pdf?src-supplier=RS+(Formerly+Allied+Electronics), ComponentLink4URL=https://datasheet.octopart.com:443/105-0752-001-Cinch-Connectors-datasheet-9995220.pdf?src-supplier=RS+(Formerly+Allied+Electronics), ComponentLink5Description=https://datasheet.octopart.com:443/105-0752-001-Cinch-Connectivity-Solutions-datasheet-180501155.pdf?src-supplier=IHS, ComponentLink5URL=https://datasheet.octopart.com:443/105-0752-001-Cinch-Connectivity-Solutions-datasheet-180501155.pdf?src-supplier=IHS, ComponentLink6Description=https://datasheet.octopart.com:443/105-0752-001-Cinch-Connectivity-Solutions-datasheet-182240639.pdf?src-supplier=IHS, ComponentLink6URL=https://datasheet.octopart.com:443/105-0752-001-Cinch-Connectivity-Solutions-datasheet-182240639.pdf?src-supplier=IHS, ComponentLink7Description=https://datasheet.octopart.com:443/105-0752-001-Emerson-Network-Power-datasheet-90554.pdf?src-supplier=element14, ComponentLink7URL=https://datasheet.octopart.com:443/105-0752-001-Emerson-Network-Power-datasheet-90554.pdf?src-supplier=element14, ComponentLink8Description=https://datasheet.octopart.com:443/105-0752-001-Emerson-Network-Power-datasheet-10411735.pdf?src-supplier=Farnell, ComponentLink8URL=https://datasheet.octopart.com:443/105-0752-001-Emerson-Network-Power-datasheet-10411735.pdf?src-supplier=Farnell, ComponentLink9Description=https://datasheet.octopart.com:443/105-0752-001-Emerson-Network-Power-datasheet-8828422.pdf?src-supplier=Farnell, ComponentLink9URL=https://datasheet.octopart.com:443/105-0752-001-Emerson-Network-Power-datasheet-8828422.pdf?src-supplier=Farnell, ComponentLink10Description=https://datasheet.octopart.com:443/105-0752-001-Emerson-Network-Power-datasheet-10031126.pdf?src-supplier=Farnell, ComponentLink10URL=https://datasheet.octopart.com:443/105-0752-001-Emerson-Network-Power-datasheet-10031126.pdf?src-supplier=Farnell, ComponentLink11Description=https://datasheet.octopart.com:443/105-0752-001-Emerson-Network-Power-datasheet-47159.pdf?src-supplier=Farnell, ComponentLink11URL=https://datasheet.octopart.com:443/105-0752-001-Emerson-Network-Power-datasheet-47159.pdf?src-supplier=Farnell, ComponentLink12Description=https://datasheet.octopart.com:443/105-0752-001-Emerson-Network-Power-datasheet-40124.pdf?src-supplier=Farnell, ComponentLink12URL=https://datasheet.octopart.com:443/105-0752-001-Emerson-Network-Power-datasheet-40124.pdf?src-supplier=Farnell, ComponentLink13Description=https://datasheet.octopart.com:443/105-0752-001-Emerson-Network-Power-datasheet-29036.pdf?src-supplier=Farnell, ComponentLink13URL=https://datasheet.octopart.com:443/105-0752-001-Emerson-Network-Power-datasheet-29036.pdf?src-supplier=Farnell, Contact Material=Silver, Contact Plating=Silver, Depth=3.96mm, Export Control Classification Number (ECCN) Code=EAR99, Gender=Female, Height=5.4102mm, Housing Color=Red, Housing Material=Nylon, Insulation="Mating End Insulated", Insulation Material=Nylon, Lead Free="Lead Free", Length=10.46mm, Lifecycle Status=Production, Manufacturer Part Number=105-0752-001, Max Current Rating=5A, Mounting Technology="Horizontal, Through Hole, Vertical", Number of Contacts=1, Number of Ports=1, Operating Supply Voltage=2.1kV, Orientation="Right Angle", Packaging=Bulk, Pricing="1=1.26, 10=1.067, 25=1.0004, 50=0.9526, 100=0.907, 250=0.85016, 500=0.80954, 1000=0.77089, 2500=0.72264 (USD)", Radiation Hardening=No, REACH SVHC=Yes, RoHS=Compliant, Stock=9687, Supplier=DigiKey, Termination=Solder, Voltage Rating (DC)=2.1kV
J18: "Test Jack, 2mm Diameter Standard Tip Plugs, 5 A, 1.32 mm, 1.5 kV, Black", Breakdown Voltage=2.1kV, Color=Black, Current Rating=5A, Manufacturer="Cinch Connectivity Solutions Johnson", Max Operating Temperature=75°C, Min Operating Temperature=-55°C, Supplier Part Number=J110-ND, Voltage Rating=1.5kV, Body Material="Nylon, Polyamide", Category=Connectors, ComponentLink1Description=https://datasheet.octopart.com:443/105-0753-001-Cinch-Connectors-datasheet-38159068.pdf?src-supplier=element14+APAC, ComponentLink1URL=https://datasheet.octopart.com:443/105-0753-001-Cinch-Connectors-datasheet-38159068.pdf?src-supplier=element14+APAC, ComponentLink2Description=https://datasheet.octopart.com:443/105-0753-001-Cinch-Connectivity-Solutions-datasheet-128870957.pdf?src-supplier=RS+(Formerly+Allied+Electronics), ComponentLink2URL=https://datasheet.octopart.com:443/105-0753-001-Cinch-Connectivity-Solutions-datasheet-128870957.pdf?src-supplier=RS+(Formerly+Allied+Electronics), ComponentLink3Description=https://datasheet.octopart.com:443/105-0753-001-Cinch-Connectors-datasheet-9764224.pdf?src-supplier=RS+(Formerly+Allied+Electronics), ComponentLink3URL=https://datasheet.octopart.com:443/105-0753-001-Cinch-Connectors-datasheet-9764224.pdf?src-supplier=RS+(Formerly+Allied+Electronics), ComponentLink4Description=https://datasheet.octopart.com:443/105-0753-001-Cinch-Connectivity-Solutions-datasheet-180501155.pdf?src-supplier=IHS, ComponentLink4URL=https://datasheet.octopart.com:443/105-0753-001-Cinch-Connectivity-Solutions-datasheet-180501155.pdf?src-supplier=IHS, ComponentLink5Description=https://datasheet.octopart.com:443/105-0753-001-Cinch-Connectivity-Solutions-datasheet-182240639.pdf?src-supplier=IHS, ComponentLink5URL=https://datasheet.octopart.com:443/105-0753-001-Cinch-Connectivity-Solutions-datasheet-182240639.pdf?src-supplier=IHS, ComponentLink6Description=https://datasheet.octopart.com:443/105-0753-001-Cinch-Connectors-datasheet-46969.pdf?src-supplier=Farnell, ComponentLink6URL=https://datasheet.octopart.com:443/105-0753-001-Cinch-Connectors-datasheet-46969.pdf?src-supplier=Farnell, ComponentLink7Description=https://datasheet.octopart.com:443/105-0753-001-Cinch-Connectors-datasheet-13702459.pdf?src-supplier=_legacy+Avnet, ComponentLink7URL=https://datasheet.octopart.com:443/105-0753-001-Cinch-Connectors-datasheet-13702459.pdf?src-supplier=_legacy+Avnet, Contact Material="Copper, Silver", Contact Plating=Silver, Country of Origin=USA, Depth=3.96mm, Diameter=2mm, Export Control Classification Number (ECCN) Code=EAR99, Gender=Female, Height=5.4102mm, Housing Color=Black, Housing Material=Nylon, Inside Diameter=2mm, Insulation="Mating End Insulated", Insulation Material=Nylon, Introduction Date=1995-01-01, Lead Free="Lead Free", Length=10.46mm, Lifecycle Status=Production, Manufacturer Part Number=105-0753-001, Max Current Rating=5A, Mounting Technology="Horizontal, Through Hole, Vertical", Number of Contacts=1, Number of Ports=1, Operating Supply Voltage=2.1kV, Orientation="Right Angle", Packaging=Bulk, Pricing="1=1.24, 10=1.057, 25=0.9912, 50=0.9436, 100=0.8985, 250=0.84216, 500=0.80196, 1000=0.76366, 2500=0.71586 (USD)", Radiation Hardening=No, REACH SVHC=Yes, RoHS=Compliant, Stock=926, Supplier=DigiKey, Termination=Solder, Voltage Rating (DC)=2.1kV
J19 J20: library part CONN_1x20_2.54mm_PinSocket_Vertical, "WR-PHD 2.54 mm Socket Header; 20 pins", Contact Resistance=20mΩ, Current Rating=3A, Insulation Resistance=1GΩ, Manufacturer="Wurth Elektronik", Manufacturer Part Number=61302011821, Max Operating Temperature=105°C, Min Operating Temperature=-40°C, Operating Supply Voltage=250V, Supplier Part Number=732-61302011821-ND, Category=Connectors, ComponentLink1Description=https://datasheet.octopart.com:443/61302011821-Wurth-Elektronik-datasheet-182028588.pdf?src-supplier=Wurth+Elektronik, ComponentLink1URL=https://datasheet.octopart.com:443/61302011821-Wurth-Elektronik-datasheet-182028588.pdf?src-supplier=Wurth+Elektronik, ComponentLink2Description=https://datasheet.octopart.com:443/61302011821-W%C3%BCrth-Elektronik-datasheet-62127820.pdf?src-supplier=Wurth+Elektronik, ComponentLink2URL=https://datasheet.octopart.com:443/61302011821-W%C3%BCrth-Elektronik-datasheet-62127820.pdf?src-supplier=Wurth+Elektronik, ComponentLink3Description=https://datasheet.octopart.com:443/61302011821-W%C3%BCrth-Elektronik-datasheet-149524182.pdf?src-supplier=Farnell, ComponentLink3URL=https://datasheet.octopart.com:443/61302011821-W%C3%BCrth-Elektronik-datasheet-149524182.pdf?src-supplier=Farnell, Contact Plating=Gold, Gender=Female, Insulation Material=PBT, Lead Pitch=2.54mm, Length=51.3mm, Orientation=Vertical, Pins=20, Pitch=2.54mm, Pricing="1=0.83, 25=0.7508, 100=0.7038, 250=0.6534, 500=0.6048, 1000=0.5058 (USD)", RoHS=Compliant, Stock=9205, Supplier=DigiKey